# Allegro board remotepanasonicDB9-rout.brd
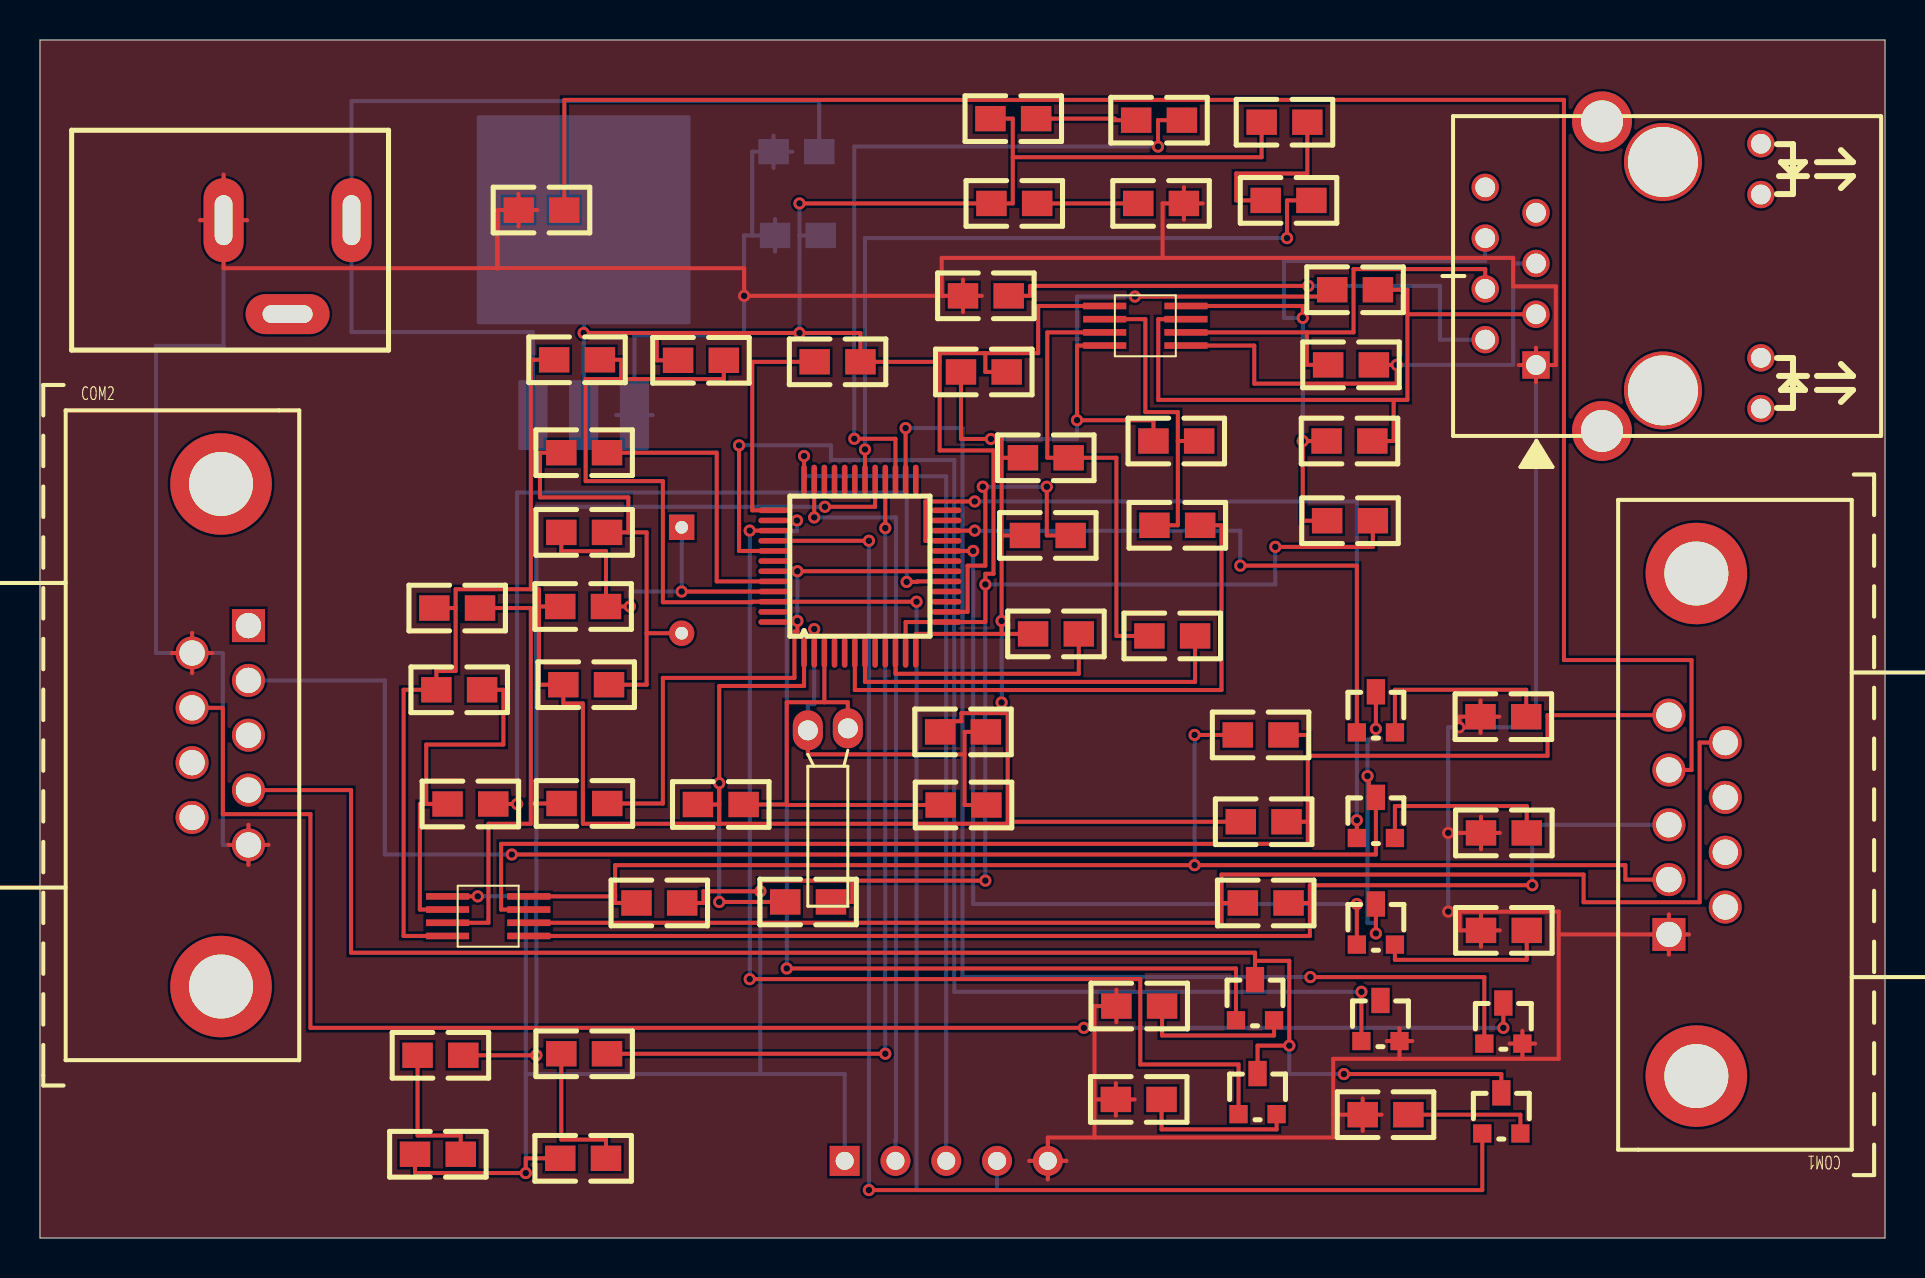
[diagram p0: board, top side]
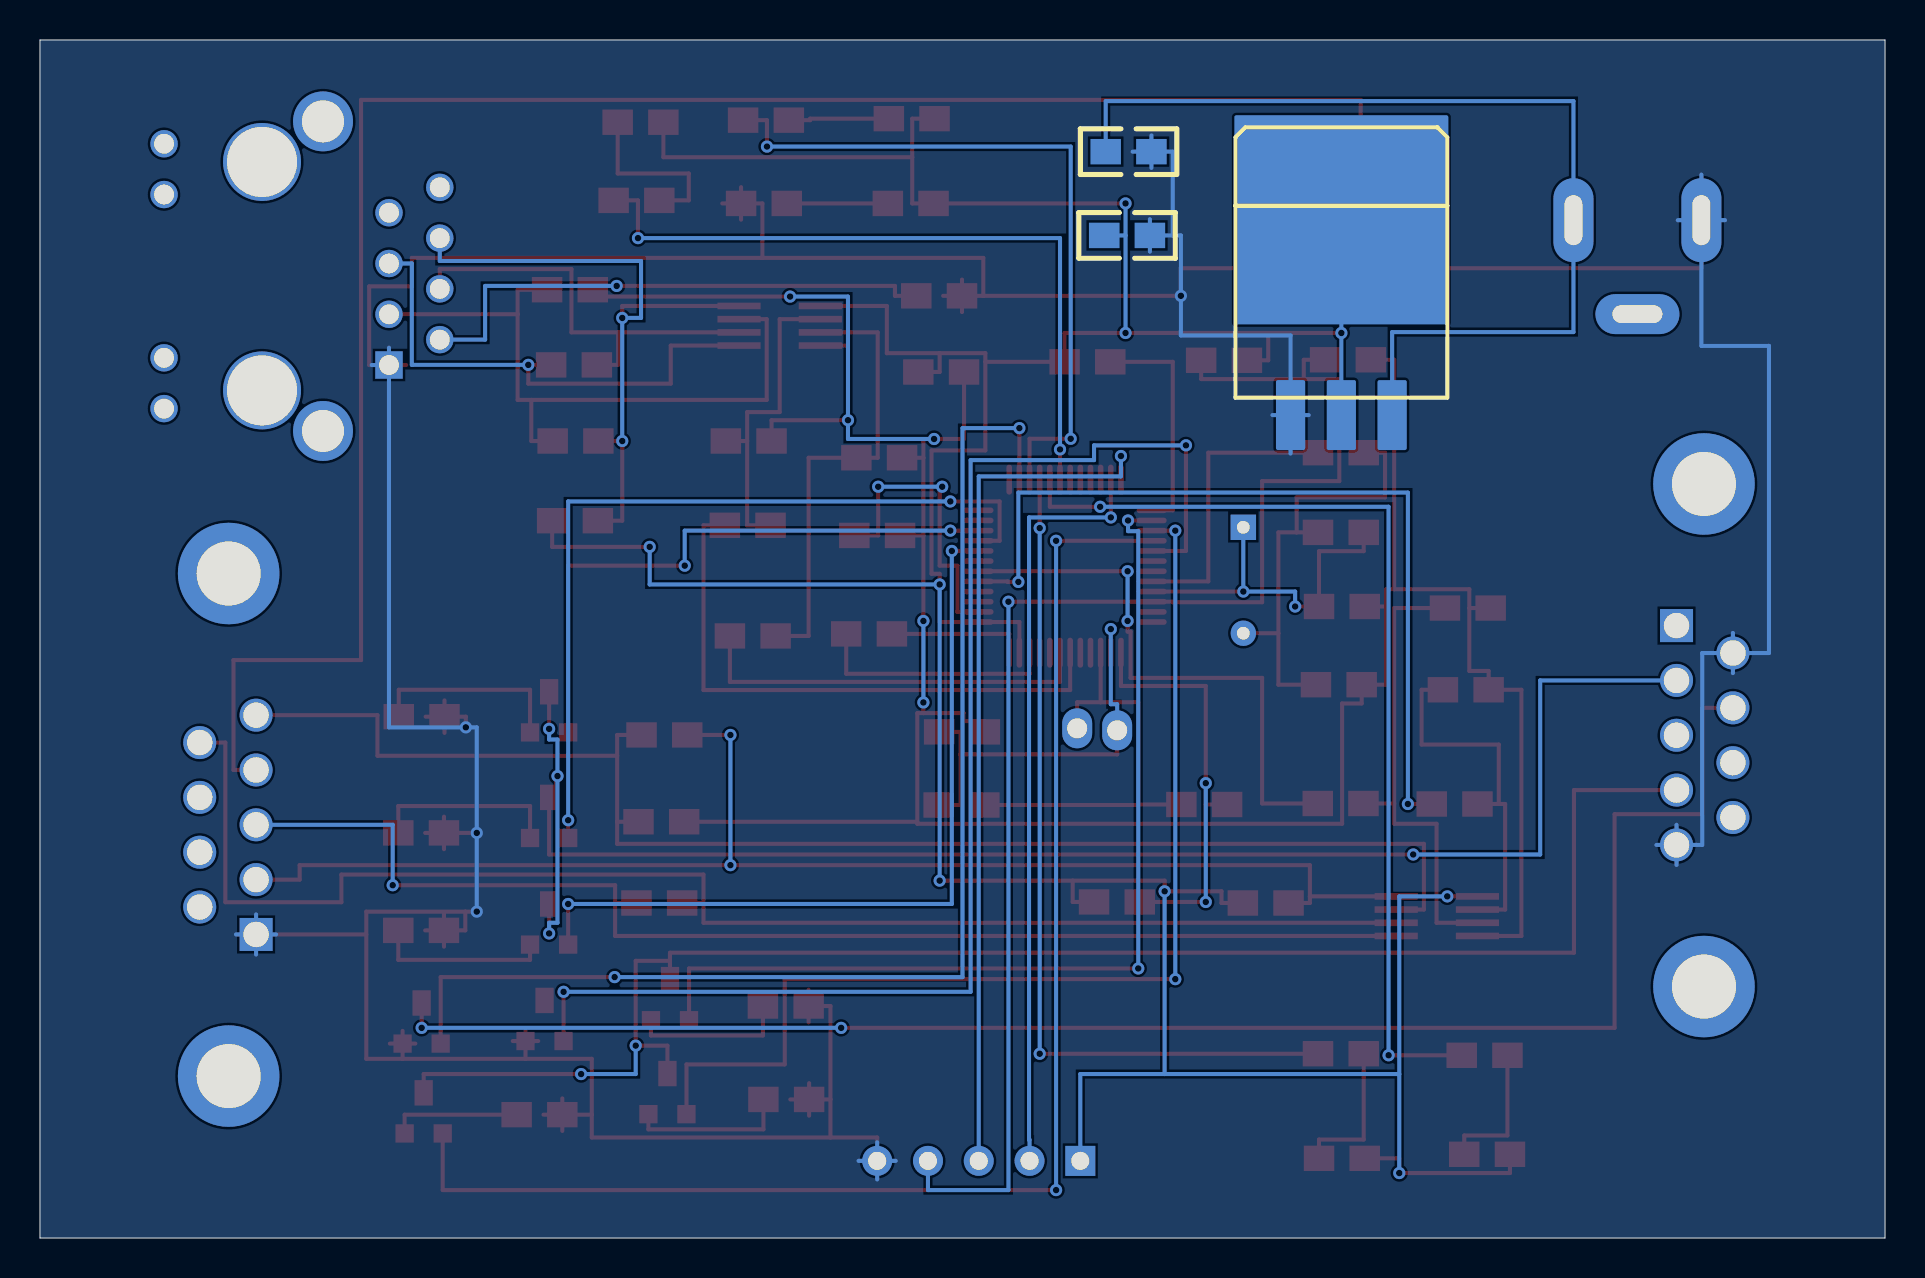
[diagram p1: board, bottom side, seen from below]

Outline 92.28 x 59.94 mm; copper layers: TOP, BOTTOM. Coordinates in mm from the lower left corner of the outline.
Outline path: 0,59.94 92.28,59.94 92.28,0 0,0 0,59.94

## Placement (name value [footprint] x y rotation side)
C1  20p  [0805]  27.32 27.69 0 top
C2  20p  [0805]  27.17 31.6 0 top
C3  10u  [0805]  26.86 43.94 0 top
C4  10U  [0805]  37.83 54.36 180 bottom
C5  22U  [0805]  37.91 50.16 180 bottom
C6  20p  [0805]  46.16 25.32 0 top
C7  20p  [0805]  34.05 21.69 0 top
C8  10u  [0805]  50.81 30.23 0 top
C9  0.1u  [0805]  47.21 43.33 0 top
C10  0.1u  [0805]  50.41 35.15 0 top
C11  0.1u  [0805]  38.42 16.81 0 top
COM1  BOXCONN_DB9  [DB9RA_M]  81.47 20.68 180 top
COM2  BOXCONN_DB9  [DB9RA_M]  10.43 25.16 0 top
IED1  <Value>  [HDR1X5]  40.25 3.86 0 top
L1  IND_MOLDED  [0805]  39.89 43.84 0 top
LED_3.1  RED  [0805]  62.45 51.92 0 top
LED_3.2  RED  [0805]  56.07 51.77 0 top
LED_3.3  RED  [0805]  20.03 9.14 0 top
LED_3.4  RED  [0805]  27.22 9.22 0 top
LED_3.5  RED  [0805]  55.97 55.93 0 top
Q1  2N7002LT1  [SOT23_B]  66.81 26.29 0 top
Q2  2N7002LT1  [SOT23_B]  66.81 21.01 0 top
Q3  2N7002LT1  [SOT23_B]  66.81 15.67 0 top
Q4  2N7002LT1  [SOT23_B]  73.19 10.72 0 top
Q5  2N7002LT1  [SOT23_B]  60.77 11.89 0 top
Q6  2N7002LT1  [SOT23_B]  60.9 7.19 0 top
Q7  2N7002LT1  [SOT23_B]  73.09 6.22 0 top
Q8  2N7002LT1  [SOT23_B]  67.04 10.85 0 top
R1  33  [0805]  27.22 39.29 0 top
R2  1M  [0805]  27.22 35.31 0 top
R3  10k  [0805]  33.06 43.92 0 top
R4  10M  [0805]  46.19 21.67 0 top
R5  22  [0805]  56.88 35.66 0 top
R6  22  [0805]  56.63 30.12 0 top
R7  4.7k  [0805]  65.52 35.89 0 top
R8  10k  [0805]  56.83 39.88 0 top
R9  100  [0805]  65.49 39.88 0 top
R10  100  [0805]  65.57 43.69 0 top
R11  10k  [0805]  50.3 39.04 0 top
R12  330  [0805]  62.24 55.83 0 top
R13  4.7k  [0805]  73.19 26.09 0 top
R14  10k  [0805]  73.22 20.27 0 top
R15  15k  [0805]  73.22 15.39 0 top
R16  330  [0805]  48.73 51.77 0 top
R17  4.7k  [0805]  54.98 11.61 0 top
R18  10k  [0805]  54.95 6.93 0 top
R19  15k  [0805]  67.3 6.17 0 top
R25  4.7k  [0805]  65.77 47.45 0 top
R26  4.7k  [0805]  30.98 16.76 0 top
R27  100  [0805]  61.05 25.17 0 top
R28  4.7k  [0805]  61.2 20.83 0 top
R29  10k  [0805]  20.87 31.52 0 top
R30  10k  [0805]  20.97 27.43 0 top
R31  100  [0805]  61.3 16.76 0 top
R32  22  [0805]  21.53 21.72 0 top
R33  22  [0805]  27.23 21.74 0 top
R34  0  [0805]  47.31 47.14 0 top
R35  0  [0805]  25.08 51.44 0 top
R36  330  [0805]  19.9 4.19 0 top
R37  330  [0805]  27.17 3.99 0 top
R38  330  [0805]  48.68 56.01 0 top
U1  DC205A  [DC205]  15.58 50.93 270 top
U2  AMS1086CM-3.3  [TO262]  27.19 47.68 180 bottom
U3  NUC122LC1AN  [NUC122LQFP48]  38.21 29.29 0 top
U5  MAX488  [MAX485]  55.28 45.64 0 top
U8  MAX488  [MAX485]  22.42 16.1 0 top
U10  RJ45  [HR911105A]  70.68 48.13 270 top
Y1  12M  [XALTDIP2]  32.09 35.56 270 top
Y2  32k  [XTAL-3_4MM-2P]  40.7 25.6 180 top

## Library data of the parts
C1-C3 C6-C11 = CAPACITOR NON-POL
C4 C5 = CAP NP
COM1 COM2 = CONNECTOR DB9_1
IED1 = CON5
L1 R1-R11 R13-R15 R17-R19 R25-R35 = R
LED_3.1-LED_3.5 = LED
Q1-Q8 = NPN_3
R12 R16 R36-R38 = RES1
U1 = DC205A
U2 = AMS1117: Tolerance: RichardLC; User Part Number: pn
U3 = NUC122LC1AN
U5 U8 = MAX485
U10 = RJ45
Y1 Y2 = CRYSTAL

## Footprints (pads in the part's own frame, mm; a bottom-side part is the same pattern mirrored in y, then rotated)
0805
  rect 1.524x1.27 smd: 1(-1.143,0) 2(1.143,0)
DB9RA_M
  rect 1.651x1.651 hole 1.27: 1(0,5.486)
  round 1.651 hole 1.27: 2(0,2.743) 3(0,0) 4(0,-2.743) 5(0,-5.486) 6(-2.819,4.115) 7(-2.819,1.372) 8(-2.819,-1.372) 9(-2.819,-4.115)
  round 5.08 hole 3.2: 10(-1.372,12.573) 11(-1.372,-12.573)
DC205
  oval 4.2x2 hole 2.5x0.889: 1(0,0) 2(0,-6.4)
  oval 2x4.2 hole 0.889x2.5: 3(4.7,-3.2)
HDR1X5
  rect 1.5x1.5 hole 0.9: 1(0,0)
  round 1.5 hole 0.9: 2(2.54,0) 3(5.08,0) 4(7.62,0) 5(10.16,0)
HR911105A
  round 3.9 hole 3.5 unplated: (-5.707,10.498) (5.723,10.498)
  rect 1.372x1.372 hole 0.991: 1(4.453,4.148)
  round 1.372 hole 0.991: 2(3.183,1.608) 3(1.913,4.148) 4(0.643,1.608) 5(-0.627,4.148) 6(-1.897,1.608) 7(-3.167,4.148) 8(-4.437,1.608) 9(6.633,15.398) 10(4.093,15.398) 11(-4.077,15.398) 12(-6.617,15.398)
  round 2.997 hole 2.1: M3(-7.737,7.448) M4(7.753,7.448)
MAX485
  rect 2.159x0.33 smd: 1(-2.032,0.991) 2(-2.032,0.33) 3(-2.032,-0.33) 4(-2.032,-0.991) 5(2.032,-0.991) 6(2.032,-0.33) 7(2.032,0.33) 8(2.032,0.991)
NUC122LQFP48
  oval 0.279x1.5 smd: 1(0,0) 2(0.508,0) 3(1.016,0) 4(1.524,0) 5(2.032,0) 6(2.54,0) 7(3.048,0) 8(3.556,0) 9(4.064,0) 10(4.572,0) 11(5.08,0) 12(5.588,0) 25(5.588,8.66) 26(5.08,8.66) 27(4.572,8.66) 28(4.064,8.66) 29(3.556,8.66) 30(3.048,8.66) 31(2.54,8.66) 32(2.032,8.66) 33(1.524,8.66) 34(1.016,8.66) 35(0.508,8.66) 36(0,8.66)
  oval 1.5x0.279 smd: 13(7.124,1.536) 14(7.124,2.044) 15(7.124,2.552) 16(7.124,3.06) 17(7.124,3.568) 18(7.124,4.076) 19(7.124,4.584) 20(7.124,5.092) 21(7.124,5.6) 22(7.124,6.108) 23(7.124,6.616) 24(7.124,7.124) 37(-1.536,7.124) 38(-1.536,6.616) 39(-1.536,6.108) 40(-1.536,5.6) 41(-1.536,5.092) 42(-1.536,4.584) 43(-1.536,4.076) 44(-1.536,3.568) 45(-1.536,3.06) 46(-1.536,2.552) 47(-1.536,2.044) 48(-1.536,1.536)
SOT23_B
  rect 0.914x1.27 smd: D(0,1.041)
  rect 0.914x0.914 smd: G(-0.953,-0.991) S(0.953,-0.991)
TO262
  custom 1.46x3.5 smd: 1(-2.54,-6.5) 2(0,-6.5) 3(2.54,-6.5)
  custom 10.7x10.46 smd: 4(0,3.27)
XALTDIP2
  rect 1.27x1.27 hole 0.635: 1(0,0)
  round 1.27 hole 0.635: 2(5.3,0)
XTAL-3_4MM-2P
  oval 1.5x2 hole 1: 1(0.3,0.1) 2(2.3,0.2)

## Nets
GND: C4.2 C5.2 COM1.1 COM2.5 COM2.6 IED1.5 LED_3.2.2 Q4.S Q8.S R13.1 R14.1 R15.1 R17.1 R18.1 R19.1 R34.1 R35.1 U1.2(GND) U2.1(GND) U10.1
GND_POWER: C1.1 C2.1 C3.1 C6.1 C7.1 C8.1 C9.1 C10.1 C11.1 R8.1 R11.1 R25.1 R28.1 R29.1 R30.1 U3.1(PVSS) U3.12(VSS) U5.4(GND) U8.4(GND)
VCC: C5.1 C9.2 C11.2 IED1.1 L1.2 R3.1 R7.2 R12.1 R16.1 R26.2 R36.1 R37.1 R38.1 U2.2(VOUT) U2.4(TAB) U3.11(VDD) U3.13(VBUS) U5.1(VCC) U8.1(VCC)
VCC5: C4.1 U1.1(VCC) U2.3(VIN)
422AI: R7.1 R9.1 U5.8(A) U10.6
422AO: COM1.2 R26.1 R27.1 U8.8(A)
422BI: R9.2 R25.2 U5.7(B) U10.3
422BO: COM1.5 R27.2 R28.2 U8.7(B)
422YI: R10.2 U5.5(Y) U10.5
422YO: COM1.3 R31.2 U8.5(Y)
422ZI: R10.1 U5.6(Z) U10.4
422ZO: COM1.9 R31.1 U8.6(Z)
A_AUDIO: COM2.7 Q4.D
A_AUDIO-1: Q8.D
A_INPUT: Q4.G U3.26(PC12)
A_INPUT1: Q8.G U3.41(PD3)
B_AUDIO: COM2.2 Q1.D Q2.D Q3.D
B_AUDIO-1: COM2.4 Q5.D Q6.D Q7.D
B_NET1: Q1.G U3.22(PC0/SPISS00)
B_NET2: Q2.G U3.21(PC1/SPICLK0)
B_NET3: Q3.G U3.20(PC2/MISO00)
B_NET11: Q5.G U3.38(PD0)
B_NET21: Q6.G U3.39(PD1)
B_NET31: Q7.G U3.40(PD2)
ICECLK: IED1.3 U3.36(ICE_CK)
ICEDATA: IED1.2 U3.35(ICE_DAT)
ICEREST: C3.2 IED1.4 R3.2 U3.46(/RESET)
PC8: LED_3.1.2 U3.30(PC8/SPISS10)
PC9: LED_3.3.2 U3.29(PC9/SPICLK1)
PC10: LED_3.4.2 U3.28(PC10/MISO10)
PC11: LED_3.5.2 U3.27(PC11/MOS110)
RXI: R5.1 R8.2 U5.2(RO)
RXO: R30.2 R32.1 U8.2(RO)
TXI: R6.1 R11.2 U5.3(DI)
TXO: R29.2 R33.1 U8.3(DI)
N5217252: C1.2 R1.1 R2.2 Y1.2
N5217271: C2.2 R2.1 U3.45(XT1_IN) Y1.1
N5217301: R1.2 U3.44(XT1_OUT)
N5217606: L1.1 U3.37(AVDD)
N5217811: C6.2 R4.2 U3.2(X32O) Y2.2
N5217823: C7.2 R4.1 U3.3(X321) Y2.1
N5218166: R5.2 U3.6(RXD1/PB4)
N5218170: R6.2 U3.7(TXD1/PB5)
N5218267: C8.2 U3.10(LDO)
N5218423: C10.2 U3.14(VDD33)
N5271660: Q1.S R13.2
N5271664: Q2.S R14.2
N5271668: Q3.S R15.2
N5281203: Q5.S R17.2
N5281215: Q7.S R19.2
N5281219: Q6.S R18.2
N5286003: R32.2 U3.17(PB0/RXD0)
N5286012: R33.2 U3.18(PB1/TXD0)
N5287388: R34.2 U10.2
N5287624: COM1.4 R35.2
N5293616: COM2.11
N5294368: COM2.3
N52191170: LED_3.2.1 R16.2
N52191690: LED_3.1.1 R12.2
N52878630: LED_3.3.1 R36.2
N52879570: LED_3.4.1 R37.2
N52880520: LED_3.5.1 R38.2

Pads without a net: COM1 6 7 8 10 11; COM2 1 8 9 10; U1 3; U3 4 5 8 9 15 16 19 23 24 25 31 32 33 34 42 43 47 48; U10 7 8 9 10 11 12 M3 M4

## Via types
v1: diameter 0.61, hole 0.33, TOP to BOTTOM, 71 vias

## Routing (per net, layer and track width the routed paths; a pad name or vN(x,y) marks a point on that pad's centre or on a via; arc(x,y) is an arc through that point)
GND: length 320
  TOP w0.203: 46.16,46.33 R34.1 ; R34.1 47.1,47.14 ; R34.1 46.16,47.96 ; R34.1 45.1,47.14 ; 67.36,9.86 Q8.S ; Q8.S 68.63,9.86 ; Q8.S 68,10.49 ; Q8.S 68,8.97 ; R17.1 52.74,11.61 52.74,6.93 ; R17.1 53.84,12.42 ; R17.1 53.84,10.79 ; R14.1 v1(70.43,20.27) ; R14.1 72.07,19.46 ; R14.1 72.07,21.08 ; R14.1 73.01,20.27 ; R15.1 73.01,15.39 ; R15.1 71.01,15.39 71.01,16.33 ; R15.1 72.07,16.21 ; R15.1 72.07,14.58 ; 52.74,5.03 64.68,5.03 64.68,6.17 ; 52.74,5.03 50.41,5.03 IED1.5 ; 52.74,5.03 52.74,6.93 ; Q4.S 74.14,10.36 ; Q4.S 74.78,9.73 ; Q4.S 74.14,8.97 ; Q4.S 73.51,9.73 ; R19.1 67.09,6.17 ; R19.1 64.68,6.17 ; R19.1 66.15,5.36 ; R19.1 66.15,6.99 ; LED_3.2.2 58.15,51.77 ; LED_3.2.2 57.21,50.95 ; LED_3.2.2 57.21,52.58 ; LED_3.2.2 56.15,51.77 56.15,49.04 ; 64.68,6.17 64.68,8.97 68,8.97 ; 9.42,19.67 COM2.5 ; COM2.5 10.43,20.67 ; COM2.5 11.43,19.67 ; COM2.5 10.43,18.67 ; R13.1 72.99,26.09 ; R13.1 70.98,26.09 v1(70.98,25.55) ; R13.1 72.05,25.27 ; R13.1 72.05,26.9 ; R18.1 54.75,6.93 ; R18.1 52.74,6.93 ; R18.1 53.81,6.12 ; R18.1 53.81,7.75 ; R35.1 24.88,51.44 ; R35.1 22.87,51.44 22.87,48.52 ; R35.1 23.94,50.62 ; R35.1 23.94,52.25 ; 56.15,49.04 45.1,49.04 45.1,47.14 ; 56.15,49.04 73.68,49.04 73.68,47.62 75.81,47.62 75.81,43.68 U10.1 ; 71.01,16.33 75.96,16.33 75.96,15.19 ; 71.01,16.33 v1(70.43,16.33) ; 45.1,47.14 v1(35.22,47.14) 35.22,48.52 22.87,48.52 ; COM1.1 81.47,16.19 ; COM1.1 75.96,15.19 ; COM1.1 81.47,14.19 ; COM1.1 82.47,15.19 ; 75.96,15.19 75.96,8.97 74.14,8.97 ; 22.87,48.52 9.18,48.52 U1.2 ; 49.48,3.86 IED1.5 ; IED1.5 51.33,3.86 ; IED1.5 50.41,2.93 ; U1.2 9.18,53.21 ; U1.2 8,50.93 ; U1.2 10.36,50.93 ; U10.1 74.82,44.54 ; U10.1 74.82,42.82 ; U10.1 73.96,43.68 ; 74.14,8.97 68,8.97 ; COM2.6 8.61,29.27 ; COM2.6 7.61,30.27 ; COM2.6 6.6,29.27 ; COM2.6 7.61,28.27
  BOTTOM w0.203: 35.62,50.16 35.22,50.16 v1(35.22,47.14) 35.22,45.16 29.73,45.16 U2.1 ; 35.62,50.16 35.62,54.36 C4.2 ; 35.62,50.16 C5.2 ; COM2.6 5.8,29.27 5.8,44.64 9.18,44.64 U1.2 ; COM2.6 7.61,30.27 ; COM2.6 9.14,29.27 9.14,19.67 COM2.5 ; COM2.6 7.61,28.27 ; IED1.5 50.41,4.79 ; IED1.5 51.33,3.86 ; IED1.5 50.41,2.93 ; IED1.5 49.48,3.86 ; 8,50.93 U1.2 ; U1.2 10.36,50.93 ; U1.2 9.18,53.21 ; COM1.1 82.47,15.19 ; COM1.1 80.47,15.19 ; COM1.1 81.47,14.19 ; COM1.1 81.47,16.19 ; v1(70.43,16.33) v1(70.43,20.27) 70.43,25.55 v1(70.98,25.55) 74.82,25.55 U10.1 ; C4.2 37.63,54.36 ; C4.2 36.69,53.54 ; C4.2 36.69,55.17 ; U10.1 74.82,44.54 ; U10.1 75.69,43.68 ; COM2.5 11.43,19.67 ; COM2.5 10.43,18.67 ; COM2.5 10.43,20.67 ; 36.77,49.35 C5.2 ; C5.2 36.77,50.98 ; 29.73,39.25 U2.1 ; U2.1 30.64,41.18 ; U2.1 28.82,41.18
GND_POWER: length 184.2
  TOP w0.203: C11.1 v1(33.97,16.81) ; C7.1 33.97,21.69 ; 33.97,21.69 33.97,20.73 ; 33.97,21.69 v1(33.97,22.76) 33.97,27.62 38.21,27.62 U3.1 ; 48.09,26.26 v1(48.09,26.8) ; 48.09,26.26 48.4,26.26 48.4,20.83 ; 48.09,26.26 46.09,26.26 46.09,25.86 45.02,25.86 C6.1 ; 48.09,30.23 43.8,30.23 U3.12 ; 48.09,30.23 C8.1 ; 48.09,30.23 v1(48.09,30.87) 48.09,35.15 ; R29.1 20.79,31.52 ; 20.79,31.52 20.79,28.37 19.82,28.37 R30.1 18.19,27.43 18.19,15.11 U8.4 ; 20.79,31.52 20.79,32.46 24.55,32.46 ; 24.55,32.46 24.55,43.94 C3.1 ; 24.55,32.46 24.96,32.46 24.96,31.6 ; 24.96,31.6 C2.1 ; 24.96,31.6 24.96,27.69 C1.1 26.17,26.75 27.15,26.75 27.15,20.73 33.97,20.73 ; 33.97,20.73 48.4,20.73 48.4,20.83 ; R11.1 48.09,39.04 ; 48.09,39.04 48.09,35.15 ; 48.09,39.04 48.09,39.98 v1(47.56,39.98) 46.06,39.98 C9.1 ; R8.1 55.69,40.92 v1(51.87,40.92) 51.87,44.65 U5.4 ; 48.4,20.83 R28.1 ; C10.1 48.09,35.15 ; R25.1 64.63,47.1 v1(54.76,47.1)
  BOTTOM w0.203: v1(33.97,16.81) v1(33.97,22.76) ; v1(47.56,39.98) 51.87,39.98 v1(51.87,40.92) 51.87,47.1 v1(54.76,47.1) ; v1(48.09,26.8) v1(48.09,30.87)
VCC: length 215.9
  TOP w0.203: R26.2 33.19,16.76 33.19,17.35 v1(36.03,17.35) 36.03,17.88 40.63,17.88 ; 45,43.84 45,44.27 47.28,44.27 ; 45,43.84 L1.2 41.03,45.28 v1(37.99,45.28) 30.85,45.28 ; 45,43.84 45,39.41 47.69,39.41 47.69,33.24 47.28,33.24 v1(47.28,32.7) 47.28,30.82 U3.13 43.29,30.82 U3.11 ; 47.28,44.27 47.28,43.33 C9.2 ; 47.28,44.27 49.92,44.27 49.92,46.63 U5.1 ; 30.85,45.28 30.85,43.92 R3.1 ; 30.85,45.28 v1(27.19,45.28) ; R36.1 18.76,3.25 v1(24.3,3.25) 24.3,3.99 R37.1 ; v1(61.79,34.58) 66.66,34.58 R7.2 ; 48.65,54.08 48.65,56.01 R38.1 ; 48.65,54.08 48.65,51.77 R16.1 v1(37.99,51.77) ; 48.65,54.08 61.1,54.08 61.1,55.83 ; C11.2 40.63,16.81 40.63,17.88 ; 40.63,17.88 v1(47.28,17.88) ; U8.1 v1(21.89,17.09)
  BOTTOM w0.203: v1(21.89,17.09) 24.3,17.09 24.3,8.2 ; 24.3,8.2 v1(24.3,3.25) ; 24.3,8.2 36.03,8.2 ; v1(47.28,17.88) v1(47.28,32.7) 61.79,32.7 v1(61.79,34.58) ; IED1.1 40.25,8.2 36.03,8.2 ; 36.03,8.2 v1(36.03,17.35) ; U2.4 v1(27.19,45.28) U2.2 ; 37.99,50.16 v1(37.99,45.28) ; 37.99,50.16 C5.1 ; 37.99,50.16 v1(37.99,51.77)
VCC5: length 50.7
  BOTTOM w0.203: U2.3 24.65,45.33 15.58,45.33 U1.1 15.58,56.89 38.98,56.89 C4.1
422AI: length 34
  TOP w0.203: U5.8 63.16,46.63 v1(63.16,46.04) ; R9.1 v1(63.16,39.88) 63.16,35.89 R7.1
  BOTTOM w0.203: v1(63.16,39.88) v1(63.16,46.04) 62.22,46.04 62.22,48.89 72.28,48.89 U10.6
422AO: length 69.4
  TOP w0.203: R26.1 28.77,16.76 28.77,17.09 ; 28.77,17.09 28.77,18.66 v1(57.75,18.66) 79.29,18.66 79.29,17.93 COM1.2 ; 28.77,17.09 U8.8 ; R27.1 v1(57.75,25.17)
  BOTTOM w0.203: v1(57.75,25.17) v1(57.75,18.66)
422BI: length 34.4
  TOP w0.203: R25.2 68.39,47.45 68.39,46.22 ; 67.7,41.94 68.39,41.94 68.39,46.22 ; 67.7,41.94 67.7,39.88 R9.2 ; 67.7,41.94 55.93,41.94 55.93,45.97 U5.7 ; U10.3 68.39,46.22
422BO: length 72.8
  TOP w0.203: 63.41,20.83 63.41,19.72 23.06,19.72 23.06,16.43 U8.7 ; 63.41,20.83 63.41,24.13 ; 63.41,20.83 R28.2 ; 63.41,24.13 63.41,25.17 R27.2 ; 63.41,24.13 75.4,24.13 75.4,26.16 COM1.5
422YI: length 26.6
  TOP w0.203: U5.5 60.73,44.65 60.73,42.75 67.86,42.75 v1(67.86,43.69) R10.2
  BOTTOM w0.203: U10.5 73.68,48.76 73.68,43.69 v1(67.86,43.69)
422YO: length 63.7
  TOP w0.203: 63.51,16.76 R31.2 ; 63.51,16.76 63.51,17.65 v1(74.64,17.65) ; 63.51,16.76 63.51,15.11 U8.5
  BOTTOM w0.203: v1(74.64,17.65) 74.64,20.68 COM1.3
422ZI: length 21.8
  TOP w0.203: U5.6 63.36,45.31 ; 63.36,45.31 65.7,45.31 65.7,48.48 72.28,48.48 U10.4 ; 63.36,45.31 63.36,43.69 R10.1
422ZO: length 72.7
  TOP w0.203: U8.6 59.09,15.77 59.09,16.76 ; R31.1 59.09,16.76 ; 59.09,16.76 59.09,18.19 77.2,18.19 77.2,16.8 83.01,16.8 83.01,24.79 COM1.9
A_AUDIO: length 82.8
  TOP w0.203: v1(52.21,10.52) 13.53,10.52 13.53,21.21 9.14,21.21 9.14,26.53 COM2.7 ; Q4.D v1(73.19,10.52)
  BOTTOM w0.203: v1(73.19,10.52) v1(52.21,10.52)
A_INPUT: length 62.3
  TOP w0.203: U3.26 v1(43.29,40.52) ; v1(63.54,13.06) 72.24,13.06 Q4.G
  BOTTOM w0.203: v1(63.54,13.06) 46.14,13.06 46.14,40.52 v1(43.29,40.52)
A_INPUT1: length 67.9
  TOP w0.203: U3.41 34.96,34.38 v1(34.96,39.66) ; Q8.G v1(66.09,12.32)
  BOTTOM w0.203: v1(34.96,39.66) 39.56,39.66 39.56,38.92 45.73,38.92 45.73,12.32 v1(66.09,12.32)
B_AUDIO: length 83.8
  TOP w0.203: v1(23.6,19.19) 66.81,19.19 Q2.D 66.46,22.05 66.46,23.11 v1(66.4,23.11) ; Q3.D v1(66.81,15.24) ; Q1.D v1(66.81,25.48)
  BOTTOM w0.203: v1(23.6,19.19) 17.25,19.19 17.25,27.9 COM2.2 ; v1(66.81,15.24) 66.81,15.77 66.4,15.77 v1(66.4,23.11) 66.4,24.94 66.81,24.94 v1(66.81,25.48)
B_AUDIO-1: length 81.7
  TOP w0.203: Q5.D 60.77,13.87 ; 60.77,13.87 62.48,13.87 v1(62.48,9.63) 60.9,9.63 Q6.D ; 60.77,13.87 60.77,14.27 15.56,14.27 15.56,22.41 COM2.4 ; Q7.D 73.09,8.2 v1(65.21,8.2)
  BOTTOM w0.203: v1(62.48,9.63) 62.48,8.2 v1(65.21,8.2)
B_NET1: length 30.6
  TOP w0.203: Q1.G 65.86,33.64 v1(60.03,33.64) ; U3.22 v1(46.75,35.39)
  BOTTOM w0.203: v1(60.03,33.64) 60.03,35.39 v1(46.75,35.39)
B_NET2: length 41.4
  TOP w0.203: v1(46.75,36.85) 44.28,36.85 44.28,34.89 U3.21 ; Q2.G v1(65.86,20.9)
  BOTTOM w0.203: v1(65.86,20.9) 65.86,36.85 v1(46.75,36.85)
B_NET3: length 40.2
  TOP w0.203: Q3.G v1(65.86,16.71) ; U3.20 v1(46.67,34.38)
  BOTTOM w0.203: v1(65.86,16.71) 46.67,16.71 v1(46.67,34.38)
B_NET11: length 49.2
  TOP w0.203: U3.38 v1(37.86,35.9) ; Q5.G 59.82,13.49 v1(37.35,13.49)
  BOTTOM w0.203: v1(37.86,35.9) 37.86,35.37 37.35,35.37 v1(37.35,13.49)
B_NET21: length 54.8
  TOP w0.203: v1(35.5,12.95) 55.03,12.95 55.03,8.69 59.94,8.69 Q6.G ; U3.39 v1(35.5,35.39)
  BOTTOM w0.203: v1(35.5,35.39) v1(35.5,12.95)
B_NET31: length 70.8
  TOP w0.203: Q7.G 72.14,2.4 v1(41.46,2.4) ; U3.40 v1(41.46,34.89)
  BOTTOM w0.203: v1(41.46,34.89) v1(41.46,2.4)
ICECLK: length 43.6
  TOP w0.203: U3.36 v1(38.21,39.13)
  BOTTOM w0.203: v1(38.21,39.13) 38.21,38.11 45.33,38.11 IED1.3
ICEDATA: length 38.2
  TOP w0.203: U3.35 v1(38.72,36.05)
  BOTTOM w0.203: IED1.2 42.79,4.92 42.81,4.92 42.81,36.05 v1(38.72,36.05)
ICEREST: length 72.5
  TOP w0.203: C3.2 29.07,43.94 29.07,42.98 ; 29.07,42.98 27.29,42.98 27.29,37.87 31.15,37.87 31.15,31.81 35.62,31.81 35.62,31.84 U3.46 v1(43.84,31.84) ; 29.07,42.98 34.2,42.98 R3.2
  BOTTOM w0.203: v1(43.84,31.84) 43.84,2.4 47.87,2.4 IED1.4
PC8: length 36.3
  TOP w0.203: v1(62.37,50.03) 62.37,51.92 LED_3.1.2 ; U3.30 v1(41.26,39.46)
  BOTTOM w0.203: v1(62.37,50.03) 41.26,50.03 v1(41.26,39.46)
PC9: length 49.4
  TOP w0.203: LED_3.3.2 v1(24.83,9.14) ; v1(39.26,36.59) 41.77,36.59 U3.29
  BOTTOM w0.203: v1(24.83,9.14) 24.83,36.59 v1(39.26,36.59)
PC10: length 42.6
  TOP w0.203: LED_3.4.2 v1(42.28,9.22) ; U3.28 v1(42.28,35.52)
  BOTTOM w0.203: v1(42.28,35.52) v1(42.28,9.22)
PC11: length 36.4
  TOP w0.203: v1(40.73,39.99) 42.79,39.99 U3.27 ; v1(55.92,54.61) 55.92,55.93 LED_3.5.2
  BOTTOM w0.203: v1(55.92,54.61) 40.73,54.61 v1(40.73,39.99)
RXI: length 16.2
  TOP w0.203: 56.91,39.88 56.91,35.66 R5.1 ; 56.91,39.88 56.91,41.33 55.28,41.33 55.28,45.97 U5.2 ; 56.91,39.88 R8.2
RXO: length 18.7
  TOP w0.203: R32.1 19.32,21.72 ; 19.32,21.72 19.32,24.69 23.18,24.69 23.18,27.43 R30.2 ; 19.32,21.72 19,21.72 19,16.43 U8.2
TXI: length 23.2
  TOP w0.203: U5.3 50.38,45.31 50.38,39.04 R11.2 53.84,39.04 53.84,30.12 R6.1
TXO: length 24
  TOP w0.203: U8.3 22.43,15.77 22.43,20.73 24.55,20.73 24.55,21.74 ; R33.1 24.55,21.74 ; 24.55,21.74 24.55,31.52 R29.2
N5217252: length 22.7
  TOP w0.203: 30.34,30.26 30.34,27.69 C1.2 ; 30.34,30.26 30.34,35.31 29.43,35.31 ; 30.34,30.26 Y1.2 ; R1.1 25.01,39.29 25.01,37.06 29.43,37.06 29.43,35.31 ; 29.43,35.31 R2.2
N5217271: length 18.3
  TOP w0.203: R2.1 26.07,34.37 28.31,34.37 C2.2 v1(29.5,31.6) ; U3.45 v1(32.09,32.35)
  BOTTOM w0.203: v1(29.5,31.6) 29.5,32.35 v1(32.09,32.35) Y1.1
N5217301: length 14.8
  TOP w0.203: R1.2 33.85,39.29 33.85,32.85 U3.44
N5217606: length 11.6
  TOP w0.203: L1.1 35.62,43.84 35.62,36.41 U3.37
N5217811: length 21.4
  TOP w0.203: U3.2 v1(38.72,30.47) ; Y2.2 38.4,24.2 46.24,24.2 ; C6.2 46.24,25.32 46.24,24.2 ; R4.2 46.24,21.67 46.24,24.2
  BOTTOM w0.203: Y2.2 38.4,26.71 38.72,26.71 v1(38.72,30.47)
N5217823: length 21.8
  TOP w0.203: 39.23,26.81 37.35,26.81 37.35,21.69 ; 39.23,26.81 U3.3 ; 39.23,26.81 40.4,26.81 Y2.1 ; C7.2 37.35,21.69 ; 37.35,21.69 37.35,21.67 R4.1
N5218166: length 29.5
  TOP w0.203: R5.2 59.09,35.66 59.09,27.42 40.75,27.42 U3.6
N5218170: length 20.3
  TOP w0.203: R6.2 57.77,27.82 41.26,27.82 U3.7
N5218267: length 12.2
  TOP w0.203: U3.10 42.79,28.23 51.96,28.23 C8.2
N5218423: length 15.2
  TOP w0.203: v1(50.36,37.59) 50.36,35.15 C10.2 ; U3.14 46.39,31.33 46.39,33.64 47.28,33.64 47.28,37.59 v1(47.16,37.59)
  BOTTOM w0.203: v1(47.16,37.59) v1(50.36,37.59)
N5271660: length 10
  TOP w0.203: R13.2 74.33,27.43 67.77,27.43 Q1.S
N5271664: length 9.5
  TOP w0.203: Q2.S 67.77,21.62 74.36,21.62 R14.2
N5271668: length 8.8
  TOP w0.203: Q3.S 67.77,13.92 74.36,13.92 R15.2
N5281203: length 7.8
  TOP w0.203: R17.2 56.12,10.13 61.72,10.13 Q5.S
N5281215: length 6.5
  TOP w0.203: Q7.S 74.04,6.17 R19.2
N5281219: length 8
  TOP w0.203: Q6.S 61.85,5.44 56.1,5.44 R18.2
N5286003: length 42.7
  TOP w0.203: U3.17 43.88,32.85 43.88,32.83 v1(43.35,32.83) ; R32.2 v1(23.86,21.72)
  BOTTOM w0.203: v1(23.86,21.72) 23.86,37.3 43.35,37.3 v1(43.35,32.83)
N5286012: length 28.6
  TOP w0.203: U3.18 v1(37.88,33.36) ; v1(37.88,30.87) 37.88,30.34 37.73,30.34 37.73,28.03 31.15,28.03 31.15,21.74 R33.2
  BOTTOM w0.203: v1(37.88,33.36) v1(37.88,30.87)
N5287388: length 27
  TOP w0.203: R34.2 49.52,47.14 49.52,47.64 v1(63.44,47.64)
  BOTTOM w0.203: v1(63.44,47.64) 70.02,47.64 70.02,44.95 U10.2
N5287624: length 96.5
  TOP w0.203: COM1.4 82.6,23.42 82.6,28.92 76.22,28.92 76.22,56.95 26.23,56.95 R35.2
N52191170: length 5.1
  TOP w0.203: R16.2 LED_3.2.1
N52191690: length 8.9
  TOP w0.203: LED_3.1.1 59.83,51.92 59.83,53.26 63.39,53.26 R12.2
N52878630: length 7.1
  TOP w0.203: LED_3.3.1 18.88,5.13 21.04,5.13 R36.2
N52879570: length 7.5
  TOP w0.203: R37.2 28.31,4.93 26.07,4.93 LED_3.4.1
N52880520: length 5.1
  TOP w0.203: R38.2 53.76,56.01 53.76,55.93 LED_3.5.1

## Copper pours and planes (outline as drawn; the poured copper is in the pictures)
GND on TOP, BOTTOM: 0,0 0,59.94 92.28,59.94 92.28,0

## Text on the board
COMPVAL_TYPE_BOTTOM: FIGURE | SIZE | 13.0 | 25.0 | 35.43 | 39.0 | 39.37 | 50.0 | 82.68 | 126.0 | 137.8 | 98.42x35.0 | DRILL CHART: TOP to BOTTOM | ALL UNITS ARE IN MILS | PLATED | NON-PLATED | QTY | 71 | 2 | 5 | 1 | 11 | 18 | 4
